# Altium PCB 1,5mm_35um_2layers_std.PcbDoc
Units mm, origin at the board's own origin, x right, y up, seen from the top; angles counter-clockwise.
Board outline 125 x 100 mm, 2 copper layers (Top Layer, Bottom Layer), stack 1.57 mm thick; 51 components, 54 nets, 253 pads, 32 vias.
Unrouted connection lines stored in the file: 24.
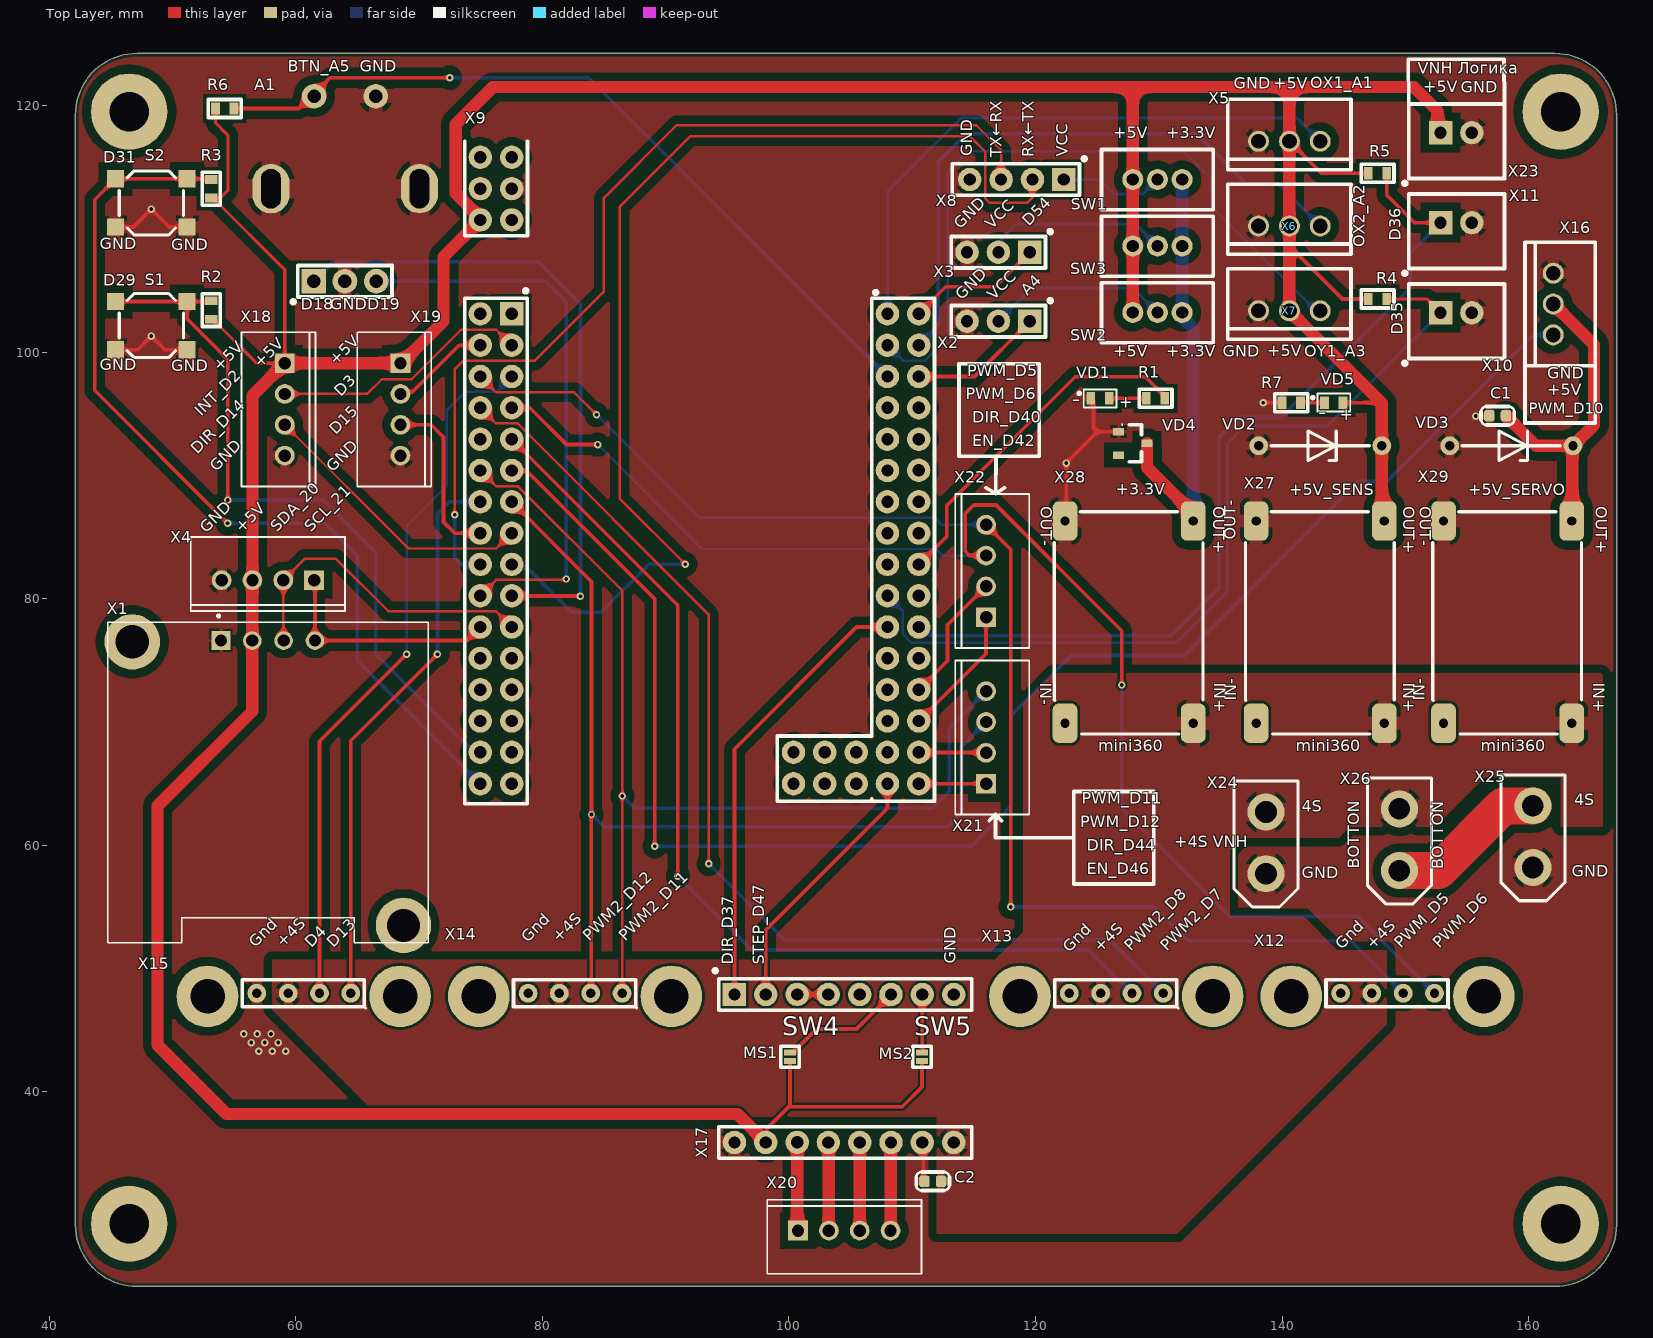
[diagram p0: Top Layer view]
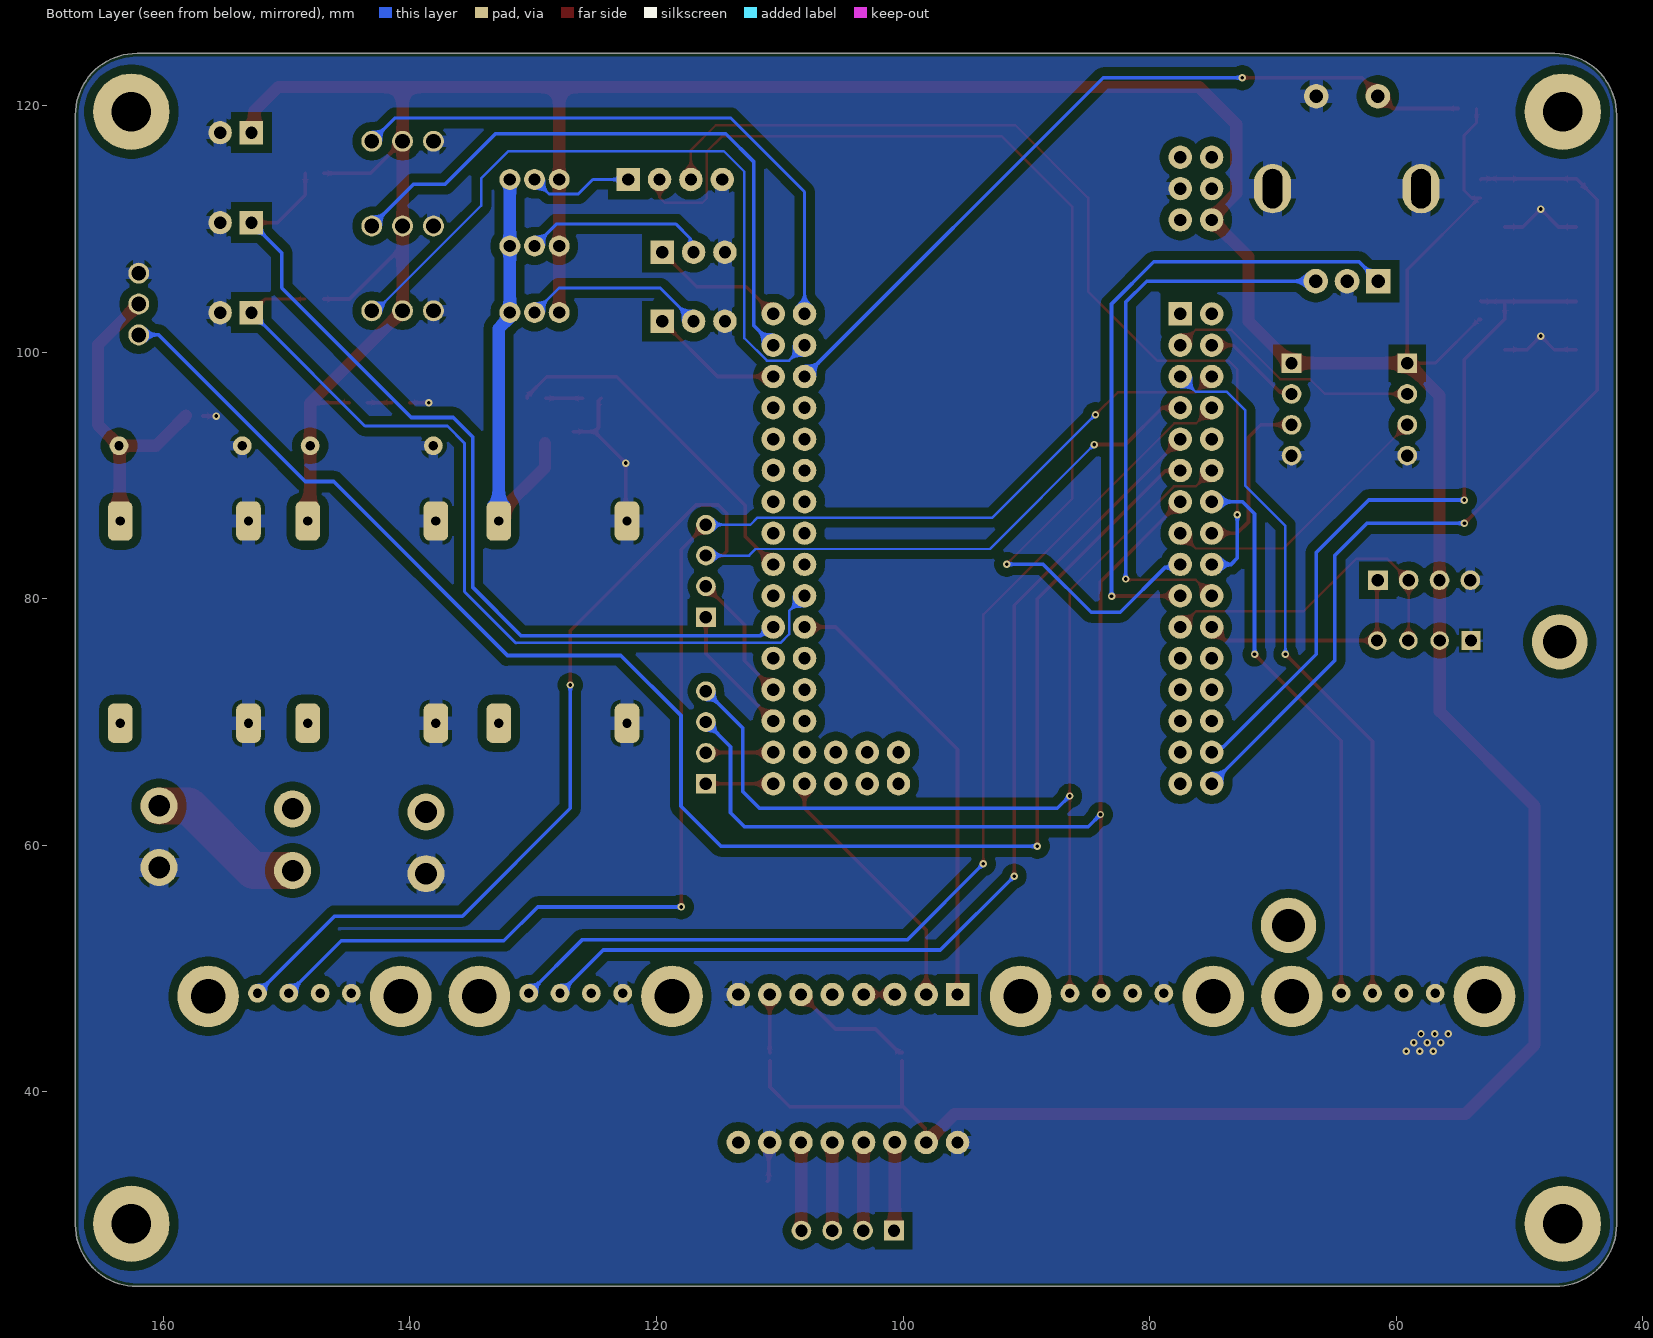
[diagram p1: Bottom Layer view, seen from below]

## Layer stack, top to bottom
Top Solder: solder mask 0.0102, Solder Resist, Dk 3.5
Top Layer: signal copper 0.035
Core 1: core 1.5, FR4, Dk 4.6
Bottom Layer: signal copper 0.035
Bottom Solder: solder mask 0.0102, Solder Resist, Dk 3.5

## Board outline
42.138,29.227 ccw(c47.138,29.227) 47.138,24.227 162.138,24.227 ccw(c162.138,29.227) 167.138,29.227 167.138,119.227 ccw(c162.138,119.227) 162.138,124.227 47.138,124.227 ccw(c47.138,119.227) 42.138,119.227

## Design rules (kind name [scope] priority, off if disabled: settings)
AcuteAngle min_acute_angle [OnCopper] p1: minimum=3.50000000000000E+0001 checktracksonly=FALSE // Минимальный угол между примитивами топологии
BoardOutlineClearance board_outline_clearance_std [NOT (OnLayer('Bottom Overlay') OR OnLayer('Top Overlay'))] p1: gap=0.25 ignorepadtopadclearanceinfootprint=FALSE except(0: Arc-SplitContinuation Track-SplitContinuation SMDPad-SplitContinuation THPad-SplitContinuation Via-SplitContinuation Fill-SplitContinuation Poly-SplitContinuation Region-SplitContinuation Text-SplitContinuation) // Отступ элементов топологии от края фрезеруемой печатной платы
Clearance Gnd [InPolygonClass('Gnd')] p1: gap=0.7 ignorepadtopadclearanceinfootprint=FALSE
Clearance clearance_outer_35um_std [OnTopLayer OR OnBottomLayer] p2: gap=0.2 ignorepadtopadclearanceinfootprint=TRUE except(0.25: Arc-Hole Track-Hole SMDPad-Hole THPad-Hole Via-Hole Fill-Hole Poly-Hole Region-Hole Text-Hole) // Зазоры на внешних слоях
Clearance clearance_inner_35um_std [NOT (OnTopLayer Or OnBottomLayer)] p3: gap=0.2 ignorepadtopadclearanceinfootprint=FALSE except(0.25: Arc-Hole Track-Hole SMDPad-Hole THPad-Hole Via-Hole Fill-Hole Poly-Hole Region-Hole Text-Hole) // Зазоры на внутренних слоях
ComponentClearance [All] p1: gap=0 collisioncheckmode=3 verticalgap=0 showdistances=FALSE
DiffPairsRouting diff_pairs_routing [All] p1: maxlimit=0.127 minlimit=0.127 mostfreqgap=0.127 toplayer_minwidth=0.143 toplayer_maxwidth=0.143 toplayer_prefwidth=0.143 bottomlayer_minwidth=0.143 bottomlayer_maxwidth=0.143 bottomlayer_prefwidth=0.143 impedanceprofiledriven=TRUE impedanceprofileid={FD46899E-B5A2-4EF5-A302-5D2DB6A51F35} maxuncoupledlength=12.7 // Правила трассировки дифференциальных пар
HoleSize min_hole_size_std [IsPad] p1: absolutevalues=TRUE maxlimit=5.9 minlimit=0.6 maxpercent=80.000 minpercent=20.000 // Диаметр межслойного переходного отверстия
HoleSize min_hole_size_via_std [IsVia] p2: absolutevalues=TRUE maxlimit=5.9 minlimit=0.3 maxpercent=80.000 minpercent=20.000 // Минимальный диаметр монтажного отверстия
HoleToHoleClearance hole_to_hole_clearance_std [All] p1: gap=0.2 allowstackedmicrovias=FALSE // Минимальное расстояние между краями двух отверстий
MinimumAnnularRing min_via_ar_std [All] p1: minimumring=0.15 // Поясок площадки переходного отверстия (Annular ring VIA)
MinimumAnnularRing min_pad_ar_std [All] p2: minimumring=0.2 // Поясок монтажной контактной площадки (Annular ring PAD)
MinimumSolderMaskSliver min_solder_mask_bridge_std [All] p1: minsoldermaskwidth=0.15 // Мнимальная ширина масочного мостика
PlaneClearance plane_clearance_35um_std [All] p1: clearance=0.2 // Отступ полигона (для слоя plane) от элементов топологии
PlaneConnect [All] p1: planeconnectstyle=Relief reliefexpansion=0.5 reliefentries=4 reliefconductorwidth=0.2 reliefairgap=0.2
PolygonConnect poly_connect_to_pad<=0.3 [(AsMM(PadXSize_AllLayers)<=0.301) or (AsMM(PadYSize_AllLayers)<=0.301)] p1: thpad.connectstyle=Relief thpad.reliefconductorwidth=0.2 thpad.reliefentries=4 thpad.polygonreliefangle="90 Angle" thpad.airgapwidth=0.2 smdpad.connectstyle=Relief smdpad.reliefconductorwidth=0.2 smdpad.reliefentries=4 smdpad.polygonreliefangle="90 Angle" smdpad.airgapwidth=0.2 via.connectstyle=Direct via.reliefconductorwidth=0.254 via.reliefentries=4 via.polygonreliefangle="90 Angle" via.airgapwidth=0.254 // Правила подключения полигонов для падов от 0,3мм и меньше
PolygonConnect poly_connect_to_pad<=0.4 [(AsMM(PadXSize_AllLayers)<=0.401) or (AsMM(PadYSize_AllLayers)<=0.401)] p2: thpad.connectstyle=Relief thpad.reliefconductorwidth=0.26 thpad.reliefentries=4 thpad.polygonreliefangle="90 Angle" thpad.airgapwidth=0.2 smdpad.connectstyle=Relief smdpad.reliefconductorwidth=0.26 smdpad.reliefentries=4 smdpad.polygonreliefangle="90 Angle" smdpad.airgapwidth=0.2 via.connectstyle=Direct via.reliefconductorwidth=0.254 via.reliefentries=4 via.polygonreliefangle="90 Angle" via.airgapwidth=0.254 // Правила подключения полигонов для падов от 0,4 и меньше
PolygonConnect poly_connect_to_pad<=0.6 [(AsMM(PadXSize_AllLayers)<=0.601) or (AsMM(PadYSize_AllLayers)<=0.601)] p3: thpad.connectstyle=Relief thpad.reliefconductorwidth=0.33 thpad.reliefentries=4 thpad.polygonreliefangle="90 Angle" thpad.airgapwidth=0.2 smdpad.connectstyle=Relief smdpad.reliefconductorwidth=0.33 smdpad.reliefentries=4 smdpad.polygonreliefangle="90 Angle" smdpad.airgapwidth=0.2 via.connectstyle=Direct via.reliefconductorwidth=0.254 via.reliefentries=4 via.polygonreliefangle="90 Angle" via.airgapwidth=0.254 // Правила подключения полигонов для падов от 0,6мм и меньше
PolygonConnect poly_connect_to_pad<=0.7 [(AsMM(PadXSize_AllLayers)<=0.701) or (AsMM(PadYSize_AllLayers)<=0.701)] p4: thpad.connectstyle=Relief thpad.reliefconductorwidth=0.46 thpad.reliefentries=4 thpad.polygonreliefangle="90 Angle" thpad.airgapwidth=0.2 smdpad.connectstyle=Relief smdpad.reliefconductorwidth=0.46 smdpad.reliefentries=4 smdpad.polygonreliefangle="90 Angle" smdpad.airgapwidth=0.2 via.connectstyle=Direct via.reliefconductorwidth=0.254 via.reliefentries=4 via.polygonreliefangle="90 Angle" via.airgapwidth=0.254 // Правила подключения полигонов для падов от 0,7мм и меньше
PolygonConnect poly_connect_to_pad<=0.8 [(AsMM(PadXSize_AllLayers)<=0.8)or(AsMM(PadYSize_AllLayers)<=0.8)] p5: thpad.connectstyle=Relief thpad.reliefconductorwidth=0.53 thpad.reliefentries=4 thpad.polygonreliefangle="90 Angle" thpad.airgapwidth=0.3 smdpad.connectstyle=Relief smdpad.reliefconductorwidth=0.53 smdpad.reliefentries=4 smdpad.polygonreliefangle="90 Angle" smdpad.airgapwidth=0.2 via.connectstyle=Direct via.reliefconductorwidth=0.254 via.reliefentries=4 via.polygonreliefangle="90 Angle" via.airgapwidth=0.254 // Правила подключения полигонов для падов от 0,8мм и меньше
PolygonConnect poly_connect_to_pad<=1 [(AsMM(PadXSize_AllLayers)<=1.01)or(AsMM(PadYSize_AllLayers)<=1.01)] p6: thpad.connectstyle=Relief thpad.reliefconductorwidth=0.6 thpad.reliefentries=4 thpad.polygonreliefangle="90 Angle" thpad.airgapwidth=0.3 smdpad.connectstyle=Relief smdpad.reliefconductorwidth=0.6 smdpad.reliefentries=4 smdpad.polygonreliefangle="90 Angle" smdpad.airgapwidth=0.2 via.connectstyle=Direct via.reliefconductorwidth=0.254 via.reliefentries=4 via.polygonreliefangle="90 Angle" via.airgapwidth=0.254 // Правила подключения полигонов для падов от 1мм и меньше
PolygonConnect poly_connect_to_pad<=1.3 [(AsMM(PadXSize_AllLayers)<=1.31)or(AsMM(PadYSize_AllLayers)<=1.31)] p7: thpad.connectstyle=Relief thpad.reliefconductorwidth=0.66 thpad.reliefentries=4 thpad.polygonreliefangle="90 Angle" thpad.airgapwidth=0.3 smdpad.connectstyle=Relief smdpad.reliefconductorwidth=0.86 smdpad.reliefentries=4 smdpad.polygonreliefangle="90 Angle" smdpad.airgapwidth=0.2 via.connectstyle=Direct via.reliefconductorwidth=0.254 via.reliefentries=4 via.polygonreliefangle="90 Angle" via.airgapwidth=0.254 // Правила подключения полигонов для падов от 1,3мм и меньше
PolygonConnect poly_connect_to_pad<=1.6 [(AsMM(PadXSize_AllLayers)<=1.61)or(AsMM(PadYSize_AllLayers)<=1.61)] p8: thpad.connectstyle=Relief thpad.reliefconductorwidth=0.8 thpad.reliefentries=4 thpad.polygonreliefangle="90 Angle" thpad.airgapwidth=0.3 smdpad.connectstyle=Relief smdpad.reliefconductorwidth=1 smdpad.reliefentries=4 smdpad.polygonreliefangle="90 Angle" smdpad.airgapwidth=0.2 via.connectstyle=Direct via.reliefconductorwidth=0.254 via.reliefentries=4 via.polygonreliefangle="90 Angle" via.airgapwidth=0.254 // Правила подключения полигонов для падов от 1,6мм и меньше
PolygonConnect poly_connect_to_pad<=1.8 [(AsMM(PadXSize_AllLayers)<=1.8)or(AsMM(PadYSize_AllLayers)<=1.8)] p9: thpad.connectstyle=Relief thpad.reliefconductorwidth=1 thpad.reliefentries=4 thpad.polygonreliefangle="90 Angle" thpad.airgapwidth=0.3 smdpad.connectstyle=Relief smdpad.reliefconductorwidth=1.2 smdpad.reliefentries=4 smdpad.polygonreliefangle="90 Angle" smdpad.airgapwidth=0.2 via.connectstyle=Direct via.reliefconductorwidth=0.254 via.reliefentries=4 via.polygonreliefangle="90 Angle" via.airgapwidth=0.254 // Правила подключения полигонов для падов от 1,8мм и меньше
PolygonConnect poly_connect_to_pad<=2 [(AsMM(PadXSize_AllLayers)<=2.01)or(AsMM(PadYSize_AllLayers)<=2.01)] p10: thpad.connectstyle=Relief thpad.reliefconductorwidth=1.1 thpad.reliefentries=4 thpad.polygonreliefangle="90 Angle" thpad.airgapwidth=0.3 smdpad.connectstyle=Relief smdpad.reliefconductorwidth=1.4 smdpad.reliefentries=4 smdpad.polygonreliefangle="90 Angle" smdpad.airgapwidth=0.2 via.connectstyle=Direct via.reliefconductorwidth=0.254 via.reliefentries=4 via.polygonreliefangle="90 Angle" via.airgapwidth=0.254 // Правила подключения полигонов для падов от 2мм и меньше
PolygonConnect poly_connect_to_pad<=2.3 [(AsMM(PadXSize_AllLayers)<=2.31)or(AsMM(PadYSize_AllLayers)<=2.31)] p11: thpad.connectstyle=Relief thpad.reliefconductorwidth=1.2 thpad.reliefentries=4 thpad.polygonreliefangle="90 Angle" thpad.airgapwidth=0.3 smdpad.connectstyle=Relief smdpad.reliefconductorwidth=1.4 smdpad.reliefentries=4 smdpad.polygonreliefangle="90 Angle" smdpad.airgapwidth=0.2 via.connectstyle=Direct via.reliefconductorwidth=0.254 via.reliefentries=4 via.polygonreliefangle="90 Angle" via.airgapwidth=0.254 // Правила подключения полигонов для падов от 2,3мм и меньше
PolygonConnect poly_connect_to_pad<=2.5 [(AsMM(PadXSize_AllLayers)<=2.51)or(AsMM(PadYSize_AllLayers)<=2.51)] p12: thpad.connectstyle=Relief thpad.reliefconductorwidth=1.2 thpad.reliefentries=4 thpad.polygonreliefangle="90 Angle" thpad.airgapwidth=0.3 smdpad.connectstyle=Relief smdpad.reliefconductorwidth=1.4 smdpad.reliefentries=4 smdpad.polygonreliefangle="90 Angle" smdpad.airgapwidth=0.2 via.connectstyle=Direct via.reliefconductorwidth=0.254 via.reliefentries=4 via.polygonreliefangle="90 Angle" via.airgapwidth=0.254 // Правила подключения полигонов для падов от 2,5мм и меньше
PolygonConnect poly_connect_to_pad<=2.7 [(AsMM(PadXSize_AllLayers)<=2.71)or(AsMM(PadYSize_AllLayers)<=2.71)] p13: thpad.connectstyle=Relief thpad.reliefconductorwidth=1.4 thpad.reliefentries=4 thpad.polygonreliefangle="90 Angle" thpad.airgapwidth=0.3 smdpad.connectstyle=Relief smdpad.reliefconductorwidth=1.6 smdpad.reliefentries=4 smdpad.polygonreliefangle="90 Angle" smdpad.airgapwidth=0.2 via.connectstyle=Direct via.reliefconductorwidth=0.254 via.reliefentries=4 via.polygonreliefangle="90 Angle" via.airgapwidth=0.254 // Правила подключения полигонов для падов от 2,7мм и меньше
PolygonConnect poly_connect_to_pad<=3 [(AsMM(PadXSize_AllLayers)<=3.01)or(AsMM(PadYSize_AllLayers)<=3.01)] p14: thpad.connectstyle=Relief thpad.reliefconductorwidth=1.6 thpad.reliefentries=4 thpad.polygonreliefangle="90 Angle" thpad.airgapwidth=0.3 smdpad.connectstyle=Relief smdpad.reliefconductorwidth=1.8 smdpad.reliefentries=4 smdpad.polygonreliefangle="90 Angle" smdpad.airgapwidth=0.2 via.connectstyle=Direct via.reliefconductorwidth=0.254 via.reliefentries=4 via.polygonreliefangle="90 Angle" via.airgapwidth=0.254 // Правила подключения полигонов для падов от 3мм и меньше
PolygonConnect poly_connect_to_pad<=7 [(AsMM(PadXSize_AllLayers)<7.01)or(AsMM(PadYSize_AllLayers)<=7.01)] p15: thpad.connectstyle=Relief thpad.reliefconductorwidth=2 thpad.reliefentries=4 thpad.polygonreliefangle="90 Angle" thpad.airgapwidth=0.4 smdpad.connectstyle=Relief smdpad.reliefconductorwidth=2 smdpad.reliefentries=4 smdpad.polygonreliefangle="90 Angle" smdpad.airgapwidth=0.3 via.connectstyle=Direct via.reliefconductorwidth=0.254 via.reliefentries=4 via.polygonreliefangle="90 Angle" via.airgapwidth=0.254 // Правила подключения полигонов для падов от 7мм и меньше
PolygonConnect poly_connect_to_pad [All] p16: thpad.connectstyle=Relief thpad.reliefconductorwidth=0.25 thpad.reliefentries=4 thpad.polygonreliefangle="90 Angle" thpad.airgapwidth=0.2 smdpad.connectstyle=Relief smdpad.reliefconductorwidth=0.25 smdpad.reliefentries=4 smdpad.polygonreliefangle="90 Angle" smdpad.airgapwidth=0.2 via.connectstyle=Direct via.reliefconductorwidth=0.25 via.reliefentries=4 via.polygonreliefangle="90 Angle" via.airgapwidth=0.2 // Правила подключения полигонов общие
RoutingCorners [All] p1 off: cornerstyle=45-Degree minsetback=2.5 maxsetback=2.5
RoutingVias [All] p1: holewidth=0.3 width=0.6 viastyle="Through Hole" minholewidth=0.3 minwidth=0.6 maxholewidth=5.9 maxwidth=6.4
SilkToSilkClearance silk_to_silk_clearance_std [All] p1 off: silktosilkclearance=0.15 // Отступ текста шелкографии от других примитивов шелкографии
SilkToSolderMaskClearance silk_to_solder_mask_clearance_std [IsPad] p1 off: minsilkscreentomaskgap=0.15 clearancetoexposedcopper=FALSE // Минимальное расстояние между элементами шелкографии и вскрытой медью
SolderMaskExpansion solder_mask_expansion_std [All] p1: expansion=0.05 istentingtop=FALSE // Припуск паяльной масски
SupplyNets "Schematic Supply Nets_5" [InNet('+4S_AKB')] p1: voltage=0.000
SupplyNets "Schematic Supply Nets_4" [InNet('+5V_SENS')] p2: voltage=0.000
SupplyNets "Schematic Supply Nets_3" [InNet('+5V_SERVO')] p3: voltage=0.000
SupplyNets "Schematic Supply Nets_2" [InNet('3,3V')] p4: voltage=0.000
SupplyNets "Schematic Supply Nets_1" [InNet('+4S')] p5: voltage=0.000
SupplyNets "Schematic Supply Nets" [InNet('GND')] p6: voltage=0.000
UnRoutedNet [All] p1: checkbadconnections=TRUE
Width width_35um_std [All] p1: maxlimit=10 minlimit=0.2 preferedwidth=0.2 checkconnectedcopper=TRUE // Ширина проводников (общая)
19 further rules are at their usual default settings.

## Classes and differential pairs
polygon class Gnd: Bottom_gnd Top_gnd
component class ETZ_TWICE: C1 C2 R7 SW4 SW5 VD2 VD3 VD4 VD5 X12 X13 X14 X15 X16 X17 X18 X19 X20 X21 X22 X23 X24 X25 X26 X27 X28 X29
component class ETZ_FIRST: A1 R1 R2 R3 R4 R5 R6 S1 S2 SW1 SW2 SW3 VD1 X1 X2 X3 X4 X5 X6 X7 X8 X9 X10 X11

## Components (designator, comment, footprint, x,y, rotation, side; value= is the part's Value field where it differs from the comment)
A1 "EC11" EC11 64,105.75 r0 top
C1 "100" C0603 157.487,94.837 r180 top
C2 "100" C0603 111.675,32.75 r180 top
R1 "1к" R0603 129.75,96.25 r180 top
R2 "10к" R0603 53.15,103.4 r270 top
R3 "10к" R0603 53.15,113.25 r270 top
R4 "10к" R0603 147.75,104.3 r180 top
R5 "10к" R0603 147.75,114.5 r180 top
R6 "10к" R0603 54.25,119.75 r180 top
R7 "1к" R0603 140.75,95.9 r0 top
S1 "IT-1187" it-1187 48.3,102.15 r0 top
S2 "IT-1187" it-1187 48.3,112.1 r0 top
SW1 "кнопка_S" SWITCH 129.9,114 r0 top
SW2 "кнопка_S" SWITCH 129.9,103.209 r0 top
SW3 "кнопка_S" SWITCH 129.9,108.604 r0 top
SW4 "" Jumper_0.5x1 100.1,42.85 r90 top
SW5 "" Jumper_0.5x1 110.8,42.85 r90 top
VD1 "RC0603FR-071K47" VD0603 125.25,96.25 r180 top
VD2 "1N4734A" DO-41 138.1,92.4 r270 top
VD3 "1N4734A" DO-41 153.6,92.4 r270 top
VD4 "BZX84C3V3" SOT23-3 127.9,92.6 r0 top
VD5 "RC0603FR-071K47" VD0603 144.2,95.9 r180 top
X1 "OLED 128x64" "OLED 128X64 0.96INCH" 44.75,52 r0 top
X2 "PLS-2.54-3" PLS-2.54-3 117,102.5 r180 top
X3 "PLS-2.54-3" PLS-2.54-3 117,108.1 r180 top
X4 "DS1069-4M (CWF-4)" CWF-4 61.5,81.5 r270 top
X5 "DS1069-3M (CWF-3)" CWF-3 140.6,117.65 r90 top
X6 "DS1069-3M (CWF-3)" CWF-3 140.6,110.775 r90 top
X7 "DS1069-3M (CWF-3)" CWF-3 140.6,103.9 r90 top
X8 "PLS-2.54-4" PLS-2.54-4 119.76,114 r180 top
X9 "Arduino Mega 2560 Pro" PBD38 109.27,100.56 r270 top
X10 "DS1069-2M (CWF-2)" CWF-2 154.13,103.2 r0 top
X11 "DS1069-2M (CWF-2)" CWF-2 154.13,110.5 r0 top
X12 "PLS-2.54-4" DRV8871 152.37,48 r180 top
X13 "PLS-2.54-4" DRV8871 130.37,48 r180 top
X14 "PLS-2.54-4" DRV8871 86.475,48 r180 top
X15 "PLS-2.54-4" DRV8871 64.475,48 r180 top
X16 "DS1069-3M (CWF-3)" CWF-3 162.55,103.897 r0 top
X17 "TMC2208 V4.0" A4988 98.13,47.9 r0 top
X18 "DS1069-4M (CWF-4)" CWF-4 59.119,99.104 r0 top
X19 "DS1069-4M (CWF-4)" CWF-4 68.5,99.104 r0 top
X20 "DS1069-4M (CWF-4)" CWF-4 100.75,28.75 r90 top
X21 "DS1069-4M (CWF-4)" CWF-4 116,65 r180 top
X22 "DS1069-4M (CWF-4)" CWF-4 116,78.5 r180 top
X23 "DS1069-2M (CWF-2)" CWF-2 154.13,117.8 r0 top
X24 "XT30UPB-M" XT30UPB-M 138.7,62.7 r270 top
X25 "XT30UPB-M" XT30UPB-M 160.35,63.2 r270 top
X26 "XT30UPB-M" XT30UPB-M 149.525,62.95 r270 top
X27 "mini360" mini360 148.3,86.3 r270 top
X28 "mini360" mini360 132.8,86.3 r270 top
X29 "mini360" mini360 163.5,86.3 r270 top

## Footprints (in the part's own frame and the unit in brackets; to place one, negate y for a bottom-side part, rotate by r counter-clockwise, add the part's x,y. Pads: shape width x height; smd on the part's side, far side on the other; paste and mask are expansions set on the pad)
A4988 [mm]
  rect 1.9x1.9 hole 1: 1(-2.54,0)
  round 1.9 hole 1: 2(0,0) 3(2.545,0.005) 4(5.08,0) 5(7.62,0) 6(10.16,0) 7(12.7,0) 8(15.24,0) 9(-2.54,-12) 10(0,-12) 11(2.545,-11.995) 12(5.08,-12) 13(7.62,-12) 14(10.16,-12) 15(12.7,-12) 16(15.24,-12)
  silkscreen extent -4.1,-13.28 16.7,1.94, body extent -3.8,-13.55 16.67,1.45, height 15.6
C0603 [mm] "Chip Capacitor, 2-Leads, Body 1,60x0,80mm, IPC Medium Density"
  rrect50% 0.85x0.95 smd: 1(-0.675,0) 2(0.675,0)
  Top Layer pour cut-out: -0.254,0.5 -0.254,-0.5 0.254,-0.5 0.254,0.5
  silkscreen extent -1.35,-0.75 1.35,0.75, body extent -0.85,-0.45 0.85,0.45, height 0.9
CWF-2 [mm] "PLS-2"
  rect 1.9x1.9 hole 1: 1(-1.27,0)
  round 1.9 hole 1: 2(1.27,0)
  silkscreen extent -4.16,-4.1 3.91,2.33, body extent -3.73,-3.55 3.77,2.2, height 7
CWF-3 [mm]
  round 1.7 hole 1.2: 1(-0.55,-2.5) 2(-0.55,0) 3(-0.55,2.5)
  silkscreen extent -2.85,-5 2.85,5, body extent -2.9,-5 2.8,5, height 7.7
CWF-4 [mm]
  rect 1.6x1.6 hole 1: 1(0,0)
  round 1.6 hole 1: 2(0,-2.5) 3(0,-5) 4(0,-7.5)
  silkscreen extent -3.5,-10 2.5,2.5, body extent -3.55,-9.95 2.2,2.45, height 7
DO-41 [mil] "zener diode"
  round 60 hole 30: 1(0,0) 2(0,393.7)
  silkscreen extent -47,39 47,354
DRV8871 [mil] "Motor driver"
  round 60 hole 30: 1(0,0) 2(100,0) 3(200,0) 4(300,0)
  round 196.85 hole 110.24: ""(-157.48,9.84) ""(457.48,9.84)
  silkscreen extent -47,-43 346,47, body extent -267,-119 581,868, height 776
EC11 [mm] "энкодер-выбор режима"
  rect 2x2 hole 1.1: A(-2.54,0)
  round 2 hole 1.1: B(2.545,0.005) C(0,0) D(-2.5,15) E(2.5,15)
  oval 3x4 hole 1.6 slot 3.2 at 90 deg: TP(-6,7.5) TP(6.043,7.507)
  silkscreen extent -4.2,-1.68 3.82,1.28, body extent -6.15,0 6.15,15, height 21.6
it-1187 [mm]
  rect 1.4x1.4 smd: 1(-2.9,1.95) 1(2.9,1.95) 2(-2.9,-1.95) 2(2.9,-1.95)
  silkscreen extent -2.6,-2.6 2.6,2.6, body extent -3.2,-2.63 3.2,2.57, height 1.5
Jumper_0.5x1 [mm]
  rect 0.5x1 smd mask+0.1: 1(-0.35,0) 2(0.35,0)
  silkscreen extent -0.85,-0.75 0.85,0.75
mini360 [mm]
  rrect50% 3.2x2 hole 0.762: 1(0,0) 2(0,-10.4) 3(16.4,0) 4(16.4,-10.4)
  silkscreen extent -0.75,-11.27 17.27,0.8, body extent -0.73,-11.23 17.27,0.77, height 3.75
"OLED 128X64 0.96INCH" [mm]
  round 1.508 hole 1: 1(16.816,24.606) 2(14.276,24.606) 3(11.736,24.606)
  round 4.5 hole 2.7: 3(2,24.5) 3(24,1.5)
  rect 1.508x1.508 / inner round 1.508 / far side rect 1.508x1.508 hole 1: 4(9.196,24.606)
  silkscreen extent 0.01,0.11 26.01,26.71, body extent 0.01,0.11 26.01,26.11, height 5.66
PBD38 [mm]
  rect 1.9x1.9 hole 1: 1(-2.54,-31.75)
  round 1.9 hole 1: 2(-2.54,-34.29) 3(0,-31.75) 7(5.08,-31.75) 8(5.08,-34.29) 13(12.7,-31.75) 14(12.7,-34.29) 19(20.32,-31.75) 20(20.32,-34.29) 25(27.94,-31.75) 26(27.94,-34.29) 31(35.56,-31.75) 32(35.56,-34.29) 33(17.78,1.27) 34(17.78,-1.27) 35(20.32,1.27) 39(25.4,1.27) 40(25.4,-1.27) 45(33.02,1.27) 46(33.02,-1.27) 51(35.56,-6.35) 52(33.02,-6.35) 57(0,1.27) 58(0,-1.27) 63(7.62,1.27) 64(7.62,-1.27) 69(15.24,1.27) 70(15.24,-1.27) 71(-15.24,-34.285) 72(-15.24,-31.745) 73(-12.7,-34.285)
  round 1.9 hole 1 mask+0.102: 4(0,-34.29) 5(2.54,-31.75) 6(2.54,-34.29) 9(7.62,-31.75) 10(7.62,-34.29) 11(10.16,-31.75) 12(10.16,-34.29) 15(15.24,-31.75) 16(15.24,-34.29) 17(17.78,-31.75) 18(17.78,-34.29) 21(22.86,-31.75) 22(22.86,-34.29) 23(25.4,-31.75) 24(25.4,-34.29) 27(30.48,-31.75) 28(30.48,-34.29) 29(33.02,-31.75) 30(33.02,-34.29) 36(20.32,-1.27) 37(22.86,1.27) 38(22.86,-1.27) 41(27.94,1.27) 42(27.94,-1.27) 43(30.48,1.27) 44(30.48,-1.27) 47(35.56,1.27) 48(35.56,-1.27) 49(35.56,-3.81) 50(33.02,-3.81) 53(35.56,-8.89) 54(33.02,-8.89) 55(-2.54,1.27) 56(-2.54,-1.27) 59(2.54,1.27) 60(2.54,-1.27) 61(5.08,1.27) 62(5.08,-1.27) 65(10.146,1.257) 66(10.16,-1.27) 67(12.7,1.27) 68(12.7,-1.27) 74(-12.7,-31.745) 75(-10.16,-34.285) 76(-10.16,-31.745)
  silkscreen extent -16.52,-35.57 37.2,2.54, body extent -17.18,-35.6 36.94,2.5, height 13.94
PLS-2.54-3 [mm]
  rect 1.9x1.9 hole 1: 1(-2.54,0)
  round 1.9 hole 1: 2(0,0) 3(2.545,0.005)
  silkscreen extent -4.2,-1.68 3.82,1.28, body extent -3.81,-1.27 3.81,1.27, height 8.59
PLS-2.54-4 [mm]
  rect 1.9x1.9 hole 1: 1(-2.54,0)
  round 1.9 hole 1: 2(0,0) 3(2.545,0.005) 4(5.08,0)
  silkscreen extent -4.2,-1.68 6.5,1.28, body extent -3.79,-1.37 6.37,1.17, height 8.6
R0603 [mm]
  rect 0.7x1 smd: 1(-0.75,0) 2(0.75,0)
  silkscreen extent -1.33,-0.73 1.33,0.73, body extent -0.8,-0.43 0.8,0.43, height 0.45
SOT23-3 [mm] "SOT23, 3-Leads, Body 2,90x2,30mm, Pitch 0,95mm, IPC Medium Density"
  rect 0.9x0.6 smd: 1(-1.15,0.95) 2(-1.15,-0.95) 3(1.15,0)
  silkscreen extent -0.9,-1.5 0.7,1.55, body extent -1.35,-1.5 1.15,1.5, height 1.05
SWITCH [mm]
  round 1.7 hole 1: 1(-2,0) 2(0,0) 3(2,0)
  silkscreen extent -4.54,-2.45 4.53,2.42, body extent -4.2,-2.19 4.5,2.31, height 7.33
VD0603 [mm]
  rect 0.7x1 smd: 1(-0.75,0) 2(0.75,0)
  Top Layer pour cut-out: -0.4,0.5 0.4,0.5 0.4,-0.5 -0.4,-0.5
  silkscreen extent -1.33,-0.73 1.8,0.73
XT30UPB-M [mm]
  round 3 hole 1.75: 1(0,0) 2(5,0)
  silkscreen extent -2.5,-2.6 7.7,2.6

## Part data
C1 C2: library part CC0603JRNPO9BN101, "Конденсатор кер. 100пФ 50В", Manufacturer=Yageo, Voltage=50В, Name=CC0603JRNPO9BN101, TKE=NP0
R1 R7: library part RC0603FR-071KL, "Резистор 1кОм 0,063Вт 1%", Manufacturer=YAGEO, Tolerance=1%, Name=RC0603FR-071KL
R2 R3 R4 R5 R6: library part RC0603FR-0710KL, "Резистор 10кОм 0,063Вт 1%", Manufacturer=YAGEO, Tolerance=1%, Name=RC0603FR-0710KL
S1 S2: "тактовая кнопка SMD", Name=IT-1187
SW1 SW2 SW3: library part BT992895, "крутые переключатели с бимов", nam=кнопка_S
SW4 SW5: library part Jumper, "Перемычка"
VD1 VD5: library part FYLS-0603BUGC, "Светодтод зеленый SMD Foryard Optoelectronics Co.", Name="Зеленый светодиод"
VD2 VD3: "Стабилитрон 5.6В, 5%, 1Вт, 1N4734A", Voltage MAX=5.88, Voltage MIN=5.32, ComponentLink1Description=HelpURL, ComponentLink1URL=https://www.promelec.ru/fs/sources/54/98/aa/7a/f161d9308e45db5c55639eb6.pdf, Name=1N4734A
VD4: "Стабилитрон 3,3В", Name=BZX84C3V3
X4 X18 X19 X20 X21 X22: library part CWF-4, "Разъем - 4 конт. прямая вилка на плату", Name="DS1069-4M (CWF-4)"
  X4: Contact_1=+5V, Contact_2=SDA, Contact_3=SCL, Contact_4=Gnd
  X18 X19: Contact_1=+5V, Contact_2=Interrupt, Contact_3=Dir, Contact_4=Gnd
  X20: Contact_1=1B, Contact_2=1A, Contact_3=2B, Contact_4=2A
  X21 X22: Contact_1=ENABLE, Contact_2=INA, Contact_3=INB/PWM, Contact_4=PWM
X5 X6 X7 X16: library part CWF-3, "Разъем - 3 конт. прямая вилка на плату", Contact_1=+5V, Contact_2=Signal, Contact_3=Gnd, Name="DS1069-3M (CWF-3)"
X10 X11 X23: library part CWF-2, "Разъем - 2 конт. прямая вилка на плату", Contact_2=Gnd, Name="DS1069-2M (CWF-2)"
  X10 X11: Contact_1=Signal
  X23: Contact_1=VDD
X17: library part A4988
X27 X28 X29: "стаб 18 на 12 мм"
A1: nam=EC11
X2 X3: Contact_1=+5V, Contact_2=Signal, Contact_3=Gnd, nam=PLS-2.54-3
X8: Contact_1=+5V/3.3V, Contact_2=Rx, Contact_3=Tx, Contact_4=Gnd, nam=PLS-2.54-4
X9: nam="Arduino Mega 2560 Pro"
X12 X13 X14 X15: Contact_1=In2, Contact_2=In1, Contact_3=Vm, Contact_4=Gnd, nam=PLS-2.54-4
X24 X25: Contact_1=+4S, Contact_2=Gnd, Name=XT30UPB-M
X26: Contact_1=VIN_AKB, Contact_2=VIN_PCB, Name=XT30UPB-M

## Free pads (board coordinates)
  round 6.2 hole 3.2: 2(46.5,29.3) 2(46.5,119.5) 2(162.6,29.3) 2(162.6,119.5)

## Via types
v1: diameter 0.6, hole 0.3, Top Layer to Bottom Layer, tented both sides, 32 vias

## Nets (pads, with @x,y where several pads share a name; then routed paths per layer and width w, separated by ;. In a path a pad name is that pad's centre, name@x,y a point inside that pad or via, vN(x,y) a via of type N, cw(c..) or ccw(c..) an arc to the next point about the centre after c; other vN are vias at no path point)
1A_STEP: X17.12 X20.2 | length 7.2
  Top Layer w0.3: X17.12 X17.12@103.23,35.88 ; X20.2@103.23,28.77 X20.2
  Top Layer w1: X20.2@103.23,28.77 X17.12@103.23,35.88
1B_STEP: X17.11 X20.1 | length 7.2
  Top Layer w0.3: X20.1@100.675,28.825 X20.1
  Top Layer w1: X20.1@100.675,28.825 X17.11
2A_STEP: X17.14 X20.4 | length 7.2
  Top Layer w0.3: X20.4 X20.4@108.27,28.77 ; X17.14@108.27,35.88 X17.14
  Top Layer w1: X20.4@108.27,28.77 X17.14@108.27,35.88
2B_STEP: X17.13 X20.3 | length 7.2
  Top Layer w1: X20.3 X17.13
3,3V: SW1.3 SW2.3 SW3.3 VD4.3 X28.1 | length 35.9
  Top Layer w1: VD4.3 129.05,90.65 132.8,86.9 X28.1
  Bottom Layer w1: SW1.3 131.9,103 131.9,102.811 132.8,101.911 X28.1
+4S: C2.1 X12.3 X13.3 X14.3 X15.3 X17.16 X24.1 X26.1 X27.3 X28.3 X29.3
+4S_AKB: X25.1 X26.2 | length 13
  Top Layer w3: X26.2 152.705,57.95 157.955,63.2 X25.1
+5V_SENS: R2.2 R3.2 R4.2 R5.2 R6.2 SW1.1 SW2.1 SW3.1 SW4.1 SW5.1 VD2.2 VD5.1 X1.3@56.486,76.606 X4.3 X5.2 X6.2 X7.2 X9.75 X17.10 X18.1 X19.1 X23.1 X27.1 | length 356.1
  Top Layer w0.2: X17.10 98.233,36.003 98.233,37.033
  Top Layer w0.25: R3.2 R3.2@53.3,112.5 ; R2.2@53.3,102.65 56.846,99.104 X18.1 59.119,106.681 R3.2@53.3,112.5 ; R6.2 53.5,118.6 54.5,117.6 54.5,113.1 53.9,112.5 R3.2@53.3,112.5
  Top Layer w0.3: R2.2 R2.2@53.3,102.65 ; 98.233,37.033 100.1,38.9 SW4.1 ; 100.1,38.8 109.2,38.8 110.8,40.4 SW5.1 ; 140.6,108.6 144.9,104.3 R4.2 ; X5.2 143.2,114.5 R5.2 ; VD5.1 148.05,95.9 148.1,95.85
  Top Layer w1: X19.1 X18.1 56.5,96.485 X4.3 56.493,81.493 56.493,76.613 56.486,76.606 56.486,70.868 48.8,63.182 48.8,43.8 54.4,38.2 95.83,38.2 X17.10 ; X19.1@68.552,99.052 72,102.5 72,107.735 X9.75 74.985,110.885 73,112.87 73,118.5 76,121.5 127.9,121.5 ; SW2.1 SW3.1 SW1.1 127.9,121.5 ; X5.2@140.6,116.85 X6.2 140.6,108.6 X7.2 148.1,95.85 VD2.2 148.1,86.5 X27.1 ; X5.2 140.6,121.5 ; X23.1 152.61,118.05 152.61,119.572 150.682,121.5 140.6,121.5 ; 127.9,121.5 140.6,121.5
+5V_SERVO: C1.1 VD3.2 X16.2 X29.1 | length 26.2
  Top Layer w1: C1.1 160.598,92.4 VD3.2 ; X16.2 165.3,100.597 165.3,94.1 VD3.2 ; X29.1 163.55,86.35 163.55,92.35 VD3.2
BTN_EC11: A1.D R6.1 X9.60 | length 64.2
  Top Layer w0.3: R6.1 60.25,119.75 61.25,120.75 A1.D 61.5,120.955 62.795,122.25 v1(72.5,122.25)
  Bottom Layer w0.3: v1(72.5,122.25) 83.77,122.25 X9.60
Button1: R2.1 S1.1 X9.30 | length 59
  Top Layer w0.3: S1.1@45.4,104.1 S1.1@51.2,104.1 ; R2.1 53.1,104.1 S1.1@51.2,104.1 ; v1(54.5,88) 54.5,99.4 51.2,102.7 S1.1@51.2,104.1
  Bottom Layer w0.3: v1(54.5,88) 62.25,88 66.5,83.75 66.5,75.5 74.036,67.964 74.096,67.964 74.52,67.54 X9.30
Button2: R3.1 S2.1 X9.32 | length 75.1
  Top Layer w0.3: R3.1 53.1,114.05 51.2,114.05 45.4,114.05 43.7,112.35 43.7,96.896 v1(54.482,86.115)
  Bottom Layer w0.3: v1(54.482,86.115) 62.385,86.115 65,83.5 65,74.98 X9.32
DIR2: X9.15 X18.3 | length 23.1
  Top Layer w0.2: X18.3 69.153,84.07 76.27,84.07 X9.15
DIR3: X9.16 X19.3 | length 14.1
  Top Layer w0.3: X19.3 70.996,94.104 72,93.1 72,86.22 72.9,85.32 X9.16
DIR_STEPER: X9.38 X17.1 | length 36.4
  Top Layer w0.3: X17.1 95.59,67.79 105.5,77.7 X9.38
EN_VNH_1: X9.47 X21.1 | length 5.5
  Top Layer w0.3: X9.47 X21.1
EN_VNH_2: X9.43 X22.1 | length 10.7
  Top Layer w0.3: X9.43 116,75.54 X22.1
GND: A1.C A1.E A1.TP C1.2 C2.2 R7.1 S1.2 S2.2 VD1.2 VD2.1 VD3.1 VD4.1 X1.4 X2.3 X3.3 X4.4 X5.3 X6.3 X7.3 X8.4 X9.74 X10.2 X11.2 X12.4 X13.4 X14.4 X15.4 X16.3 X17.8 X17.9 X17.15 X18.4 X19.4 X23.2 X24.2 X25.2 X27.2 X27.4 X28.2 X28.4 X29.2 X29.4 | length 32.5
  Top Layer w0.3: S1.2@45.4,100.2 47.2,100.2 v1(48.3,101.3) 49.4,100.2 S1.2@51.2,100.2 ; S2.2@45.4,110.15 46.85,110.15 v1(48.3,111.6) 49.75,110.15 S2.2@51.2,110.15 ; X17.15 110.915,35.815 110.915,32.835 C2.2 ; X28.2 122.5,86.4 v1(122.5,91) 125.05,93.55 ; VD1.2 124.712,96.038 124.712,93.888 125.05,93.55 ; VD4.1 125.05,93.55 ; v1(138.489,95.901) 138.49,95.9 R7.1 ; v1(155.712,94.812) 156.787,94.812 C1.2@156.812,94.787
  other v1: 57,43.3 58.1,43.3 59.2,43.3 56.4,44 57.5,44 58.6,44 55.8,44.7 56.9,44.7 58,44.7
I_ANALOG: X2.1 X9.59 | length 10.9
  Top Layer w0.3: X9.59 115.06,98.02 X2.1
I_DIGITAL: X3.1 X9.55 | length 11.1
  Top Layer w0.25: X9.55 112.74,105.3 116.74,105.3 X3.1
Interrupt2: X9.3 X18.2 | length 21.1
  Top Layer w0.2: X18.2 65.804,96.604 67,97.8 69.4,97.8 73.41,101.81 76.27,101.81 X9.3
Interrupt3: X9.4 X19.2 | length 8.2
  Top Layer w0.3: X19.2@68.5,96.5 68.786,96.786 69.486,96.786 73.26,100.56 X9.4
Interrupt18: A1.A X9.19 | length 53
  Top Layer w0.3: X9.19 77.54,80.22 83.08,80.22 v1(83.1,80.2)
  Bottom Layer w0.3: A1.A 63.035,107.325 79.675,107.325 83.1,103.9 v1(83.1,80.2)
Interrupt19: A1.B X9.20 | length 46.1
  Top Layer w0.2: X9.20 76.27,81.53 81.895,81.53 v1(81.961,81.596)
  Bottom Layer w0.3: A1.B 80.245,105.755 81.961,104.039 v1(81.961,81.596)
LED: R1.1 X9.33 | length 28.6
  Top Layer w0.3: X9.33 112.8,85.04 112.8,87.566 123.234,98 128.9,98 130.5,96.4 R1.1
LIGHT_X_1: X5.1 X9.56 | length 48.3
  Bottom Layer w0.25: X9.56 108,113 114,119 141.2,119 X5.1
LIGHT_X_2: X6.1 X9.57 | length 50.5
  Bottom Layer w0.3: X9.57 112.11,102.13 112.11,115.41 114.4,117.7 133.061,117.7 137.136,113.625 139.7,113.625 X6.1
LIGHT_Y_1: X7.1 X9.58 | length 57.2
  Bottom Layer w0.2: X9.58 109.25,99.31 111.058,99.31 112.875,101.127 112.875,114.623 114.552,116.3 132,116.3 134.229,114.071 134.229,111.871 142.75,103.35 X7.1
NetR1_2: R1.2 VD1.1 | length 3
  Top Layer w0.3: VD1.1 R1.2
NetR7_2: R7.2 VD5.2 | length 1.9
  Top Layer w0.3: R7.2 VD5.2
NetSW1_2: SW1.2 X8.1 | length 8.6
  Bottom Layer w0.25: X8.1 125.168,114 126.343,112.825 128.725,112.825 SW1.2
NetSW2_2: SW2.2 X2.2 | length 14.8
  Bottom Layer w0.25: X2.2 119.7,105.2 127.909,105.2 SW2.2
NetSW3_2: SW3.2 X3.2 | length 15.1
  Bottom Layer w0.25: X3.2 117.265,108.365 117.265,109.209 118.457,110.4 128.104,110.4 SW3.2
NetSW4_2: SW4.2 X17.6 | length 10.1
  Top Layer w0.3: SW4.2 100.35,43.2 102.25,45.1 105.49,45.1 X17.6
NetSW5_2: SW5.2 X17.7 | length 4.7
  Top Layer w0.3: SW5.2 110.83,43.23 X17.7
NetX17_3: X17.3 X17.4 | length 2.5
  Top Layer w0.3: X17.3 100.678,47.903 103.207,47.903 X17.4
PWM1_MOT_A: X9.7 X12.1 X22.3 | length 111.5
  Top Layer w0.3: X9.7 78.98,95.48 81.96,92.5 v1(84.5,92.5) ; X22.3 114.639,83.5 114.3,83.839 114.3,86.9 115,87.6 116.8,87.6 127,77.4 v1(127,73)
  Bottom Layer w0.2: v1(84.5,92.5) 92.97,84.03 111.97,84.03 112.5,83.5 X22.3
  Bottom Layer w0.3: v1(127,73) 127,63 135.75,54.25 146.12,54.25 X12.1
PWM1_MOT_B: X9.8 X13.1 | length 86.9
  Top Layer w0.2: X9.8 76.23,94.23 77.998,94.23 93.5,78.728 v1(93.5,58.5)
  Bottom Layer w0.3: v1(93.5,58.5) 99.673,52.327 126.043,52.327 X13.1
PWM1_MOT_C: X9.12 X14.1 X21.4 | length 85.1
  Top Layer w0.2: X9.12 76.27,89.11 78.038,89.11 86.5,80.648 v1(86.5,64) 86.488,63.987 86.488,48.012 X14.1
  Bottom Layer w0.3: v1(86.5,64) 87.5,63 111.65,63 113,64.35 113,69.5 X21.4
PWM1_MOT_D: X9.14 X15.1 | length 45.7
  Top Layer w0.3: X15.1 64.475,68.475 v1(71.5,75.5)
  Bottom Layer w0.3: v1(71.5,75.5) 71.5,86.882 72.478,87.86 X9.14
PWM2_MOT_A: X9.6 X12.2 X22.4 | length 112.6
  Top Layer w0.2: X9.6 76.27,96.73 82.599,96.73 v1(84.404,94.925)
  Top Layer w0.3: X22.4 118,84 v1(118,55)
  Bottom Layer w0.2: v1(84.404,94.925) 92.756,86.573 111.815,86.573 112.388,86 X22.4
  Bottom Layer w0.3: v1(118,55) 129.642,55 132.392,52.25 145.58,52.25 X12.2
PWM2_MOT_B: X9.9 X13.2 | length 81.8
  Top Layer w0.3: X9.9 91,79.46 v1(91,57.5)
  Bottom Layer w0.3: v1(91,57.5) 91,57.49 96.99,51.5 124.33,51.5 X13.2
PWM2_MOT_C: X9.13 X14.2 X21.3 | length 81.6
  Top Layer w0.3: X9.13 84,81.38 v1(84,62.5) 83.968,62.468 83.968,48.032 X14.2
  Bottom Layer w0.3: v1(84,62.5) 85,61.5 112.865,61.5 114,62.635 114,68 X21.3
PWM2_MOT_D: X9.5 X15.2 | length 58
  Top Layer w0.3: X15.2 61.935,68.435 v1(69,75.5)
  Bottom Layer w0.2: v1(69,75.5) 69,85.9 72.25,89.15 72.25,95.277 73.743,96.77 76.27,96.77 X9.5
Rx: X8.2 X9.17 | length 90.4
  Top Layer w0.2: v1(91.6,82.8) 86.3,88.1 86.3,111.8 92,117.5 114.7,117.5 115.93,116.27 115.93,112.465 116.295,112.1 119.327,112.1 119.76,112.533 X8.2
  Bottom Layer w0.3: X9.17 77.77,82.53 78.77,82.53 82.4,78.9 84.756,78.9 88.656,82.8 v1(91.6,82.8)
SCL: X1.1 X4.1 X9.22 | length 18.8
  Top Layer w0.3: X4.1 61.566,81.434 X1.1 73.886,76.606 X9.22
SDA: X1.2 X4.2 X9.21 | length 26.4
  Top Layer w0.2: X1.2 59.013,76.619 59.013,81.487 X4.2 60.75,83.25 63.25,83.25 67.51,78.99 76.23,78.99 X9.21
Servo: X9.11 X16.1 | length 130.3
  Top Layer w0.3: X9.11 77.564,90.356 78.744,90.356 89.118,79.982 v1(89.118,59.925)
  Bottom Layer w0.3: v1(89.118,59.925) 114.782,59.925 118.028,63.17 118.028,70.528 122.9,75.4 132.086,75.4 146.186,89.5 148.5,89.5 160.397,101.397 X16.1
STEP_STEPER: X9.48 X17.2 | length 21.2
  Top Layer w0.3: X17.2 98.13,53.13 108,63 X9.48
SWITCH_X: R4.1 X9.36 X10.1 | length 70.9
  Top Layer w0.25: R4.1 151.76,104.3 X10.1
  Bottom Layer w0.2: X9.36 109.25,78.99 109.25,77.114 109.954,76.41 131.41,76.41
  Bottom Layer w0.25: X9.36@107.74,80.5 X9.36 ; 131.41,76.41 135.575,80.575 135.575,92.614 136.961,94 143.66,94 152.035,102.375 X10.1
SWITCH_Y: R5.1 X9.37 X11.1 | length 72.3
  Top Layer w0.3: R5.1 148.5,112.75 150.75,110.5 X11.1
  Bottom Layer w0.3: X9.37 110.866,77.7 111.566,77 131,77 134.9,80.9 134.9,93.1 136.5,94.7 139.898,94.7 150.405,105.207 150.405,108.045 X11.1
Tx: X8.3 X9.18 | length 77.8
  Top Layer w0.2: v1(72.9,86.8) 72.9,98.6 73.61,99.31 79.41,99.31 85,104.9 85,112.5 90.9,118.4 115.2,118.4 117.215,116.385 X8.3
  Bottom Layer w0.3: v1(72.9,86.8) 72.9,83.3 73.42,82.78 X9.18
VNH_MOT1_A: X9.45 X21.2 | length 5.5
  Top Layer w0.3: X9.45 110.56,67.52 115.98,67.52 X21.2
VNH_MOT2_A: X9.41 X22.2 | length 10.6
  Top Layer w0.3: X9.41 112.878,74.958 112.878,77.878 X22.2
pads on no net: VD4.2 X1.3@46.75,76.5 X1.3@68.75,53.5 X9.1 X9.2 X9.10 X9.23 X9.24 X9.25 X9.26 X9.27 X9.28 X9.29 X9.31 X9.34 X9.35 X9.39 X9.40 X9.42 X9.44 X9.46 X9.49 X9.50 X9.51 X9.52 X9.53 X9.54 X9.61 X9.62 X9.63 X9.64 X9.65 X9.66 X9.67 X9.68 X9.69 X9.70 X9.71 X9.72 X9.73 X9.76 X12. X13. X14. X15. X17.5

## Polygon pours and split planes (outlines as drawn)
+4S on Top Layer "+4S_L01_P011" (solid, remove dead copper, pour order 11): 152.425,61.5 156.425,65.5 162.6,65.5 162.6,61.5 166,61.5 166.025,73.962 121.462,73.962 119,71.5 119,53 116.7,50.7 58.1,50.7 58.1,46.669 66.769,38 112,38 112,28.5 131.5,28.5 148.5,45.5 148.5,51.5 144.5,51.5 141.8,54.2 139.3,54.2 139.25,54.25 135.75,54.25 135.75,59.584 136.766,60.6 144.6,60.6 145.5,61.5
GND on Top Layer "Top_gnd" (solid, pour order 15): 42.138,29.227 ccw(c47.138,29.227) 47.138,24.227 162.138,24.227 ccw(c162.138,29.227) 167.138,29.227 167.138,119.227 ccw(c162.138,119.227) 162.138,124.227 47.138,124.227 ccw(c47.138,119.227) 42.138,119.227
GND on Bottom Layer "Bottom_gnd" (solid, pour order 14): 42.138,29.227 42.138,119.227 cw(c47.138,119.227) 47.138,124.227 162.138,124.227 cw(c162.138,119.227) 167.138,119.227 167.138,29.227 cw(c162.138,29.227) 162.138,24.227 47.138,24.227 cw(c47.138,29.227)

## Silkscreen, mask and mechanical layers (free items; w line width, h text height)
Top Overlay:
  lines w0.3: 116,89 116.781,88.525 ; 116.25,62 116.77,62.5 ; 116.796,91.561 116.781,88.525 ; 117.25,62 116.77,62.5 ; 117.5,89 116.781,88.525 ; 123.1,60.614 116.784,60.614 116.77,60.629 116.77,62.5 ; 150.287,120.129 150.25,123.75 158,123.75 158.039,120.129 ; 159.7,98.897 159.7,94.25 165.4,94.25 165.4,98.897 ; 113.81,91.561 113.81,99.061 120.31,99.061 120.31,91.561 113.81,91.561 ; 123.1,56.864 129.6,56.864 129.6,64.364 123.1,64.364 123.1,56.864
  text "BTN_A5" at 59.351,122.424 h1.6
  text "GND" at 65.2,122.417 h1.6
  text "VNH Логика" at 151,122.267 h1.6
  text "OX1_A1" at 142.3,121.074 h1.6
  text "GND" at 136.1,121.017 h1.6
  text "+5V" at 139.3,121.017 h1.6
  text "+5V" at 151.456,120.743 h1.6
  text "GND" at 154.5,120.717 h1.6
  text "+5V" at 126.3,117.017 h1.6
  text "+3.3V" at 130.6,117.017 h1.6
  text "GND" at 115.183,115.9 h1.6 r90
  text "VCC" at 122.934,115.824 h1.6 r90
  text "TX←RX" at 117.6,115.8 h1.6 r90
  text "RX←TX" at 120.2,115.8 h1.6 r90
  text "D31" at 44.4,115.017 h1.6
  text "D54" at 119.688,109.912 h1.6 r45
  text "GND" at 114.133,109.687 h1.6 r45
  text "VCC" at 116.721,109.687 h1.6 r45
  text "D36" at 149.952,109.031 h1.6 r90
  text "OX2_A2" at 147.026,108.5 h1.6 r90
  text "GND" at 44.1,108.017 h1.6
  text "GND" at 49.9,107.917 h1.6
  text "D29" at 44.4,105.067 h1.6
  text "A4" at 119.6,104.3 h1.6 r45
  text "GND" at 114.263,103.911 h1.6 r45
  text "VCC" at 116.851,103.911 h1.6 r45
  text "D18" at 60.4,103.117 h1.6
  text "GND" at 62.8,103.117 h1.6
  text "D19" at 65.8,103.117 h1.6
  text "D35" at 150.116,101.395 h1.6 r90
  text "+5V" at 138.8,99.334 h1.6
  text "+5V" at 126.3,99.317 h1.6
  text "+3.3V" at 130.6,99.317 h1.6
  text "GND" at 135.2,99.317 h1.6
  text "OY1_A3" at 141.8,99.317 h1.6
  text "+5V" at 63.488,98.612 h1.6 r45
  text "+5V" at 57.388,98.412 h1.6 r45
  text "GND" at 44.1,98.217 h1.6
  text "GND" at 49.9,98.117 h1.6
  text "+5V" at 54.088,98.112 h1.6 r45
  text "PWM_D5" at 114.46,97.735 h1.6
  text "GND" at 161.5,97.517 h1.6
  text "+5V" at 161.5,96.176 h1.6
  text "D3" at 63.888,96.112 h1.6 r45
  text "PWM_D6" at 114.36,95.835 h1.6
  text "–" at 123,95.409 h1.6
  text "+" at 126.8,95.156 h1.6
  text "PWM_D10" at 160,94.663 h1.5
  text "INT_D2" at 52.577,94.523 h1.6 r45
  text "–" at 143,94.396 h1.52
  text "+" at 144.7,94.156 h1.6
  text "DIR_D40" at 114.86,93.935 h1.6
  text "D15" at 63.488,93.012 h1.6 r45
  text "EN_D42" at 114.86,92.035 h1.6
  text "DIR_D14" at 52.277,91.423 h1.6 r45
  text "GND" at 53.788,90.012 h1.6 r45
  text "GND" at 63.265,89.958 h1.6 r45
  text "+3.3V" at 126.5,88.117 h1.6
  text "+5V_SENS" at 140.6,88.074 h1.6
  text "+5V_SERVO" at 155.1,88.074 h1.6
  text "SDA_20" at 58.723,85.123 h1.6 r45
  text "SCL_21" at 61.462,85.123 h1.6 r45
  text "GND" at 52.988,85.012 h1.6 r45
  text "+5V" at 55.888,85.012 h1.6 r45
  text "PWM_D11" at 123.75,63.038 h1.6
  text "4S" at 163.7,62.917 h1.6
  text "4S" at 141.6,62.393 h1.6
  text "PWM_D12" at 123.65,61.138 h1.6
  text "+4S VNH" at 131.25,59.517 h1.6
  text "DIR_D44" at 124.15,59.238 h1.6
  text "BOTTON" at 146.608,58.097 h1.6 r90
  text "BOTTON" at 153.419,58.067 h1.6 r90
  text "EN_D46" at 124.15,57.338 h1.6
  text "GND" at 163.5,57.117 h1.6
  text "GND" at 141.6,57.022 h1.6
  text "PWM2_D12" at 84.077,51.923 h1.6 r45
  text "PWM2_D11" at 86.977,51.923 h1.6 r45
  text "Gnd" at 79.088,51.812 h1.6 r45
  text "+4S" at 81.588,51.812 h1.6 r45
  text "Gnd" at 56.988,51.412 h1.6 r45
  text "+4S" at 59.188,51.412 h1.6 r45
  text "D4" at 61.513,51.4 h1.6 r45
  text "D13" at 63.288,51.412 h1.6 r45
  text "PWM_D5" at 149.877,51.346 h1.6 r45
  text "PWM_D6" at 152.977,51.346 h1.6 r45
  text "Gnd" at 145.088,51.235 h1.6 r45
  text "+4S" at 147.588,51.235 h1.6 r45
  text "PWM2_D8" at 127.977,51.123 h1.6 r45
  text "PWM2_D7" at 130.877,51.123 h1.6 r45
  text "Gnd" at 122.988,51.012 h1.6 r45
  text "+4S" at 125.488,51.012 h1.6 r45
  text "GND" at 113.883,50.4 h1.6 r90
  text "DIR_D37" at 95.826,50.3 h1.6 r90
  text "STEP_D47" at 98.326,50.3 h1.6 r90
  text "MS1" at 96.3,42.417 h1.6
  text "MS2" at 107.3,42.317 h1.6
Board:
  the board outline again, w0.013
Assembly Notes:
  text "'.title'" at 50,47.5 h1.6
  text "'.project'_'.pcb_dec_number'['.Pcb_File_Name_No_Path']" at 50,45 h1.6

## Text inside footprints (layer, text, board x,y; h text height)
X27: Top Overlay "OUT+" at 149.517,87.493 h1.6 r270; Top Overlay "IN+" at 149.5,73.2 h1.6 r270; Top Overlay "IN-" at 136.6,71.703 h1.6 r90; Top Overlay "OUT-" at 136.583,84.8 h1.6 r90
X28: Top Overlay "OUT+" at 134.117,87.493 h1.6 r270; Top Overlay "IN+" at 134.2,73.2 h1.6 r270; Top Overlay "IN-" at 120.075,73.2 h1.6 r270; Top Overlay "OUT-" at 120.092,87.493 h1.6 r270
X29: Top Overlay "IN+" at 164.9,73.2 h1.6 r270; Top Overlay "IN-" at 151.9,71.703 h1.6 r90; Top Overlay "OUT+" at 165.117,87.493 h1.6 r270; Top Overlay "OUT-" at 150.842,87.493 h1.6 r270